# Altium PCB PCB Modulo mcp23017.PcbDoc
Units mm, origin at the board's own origin, x right, y up, seen from the top; angles counter-clockwise.
Board outline 25 x 61 mm, 4 copper layers (Top Layer, L1, L2, Bottom Layer), stack 0.603 mm thick; 67 components, 42 nets, 187 pads, 71 vias.
Unrouted connection lines stored in the file: 13.
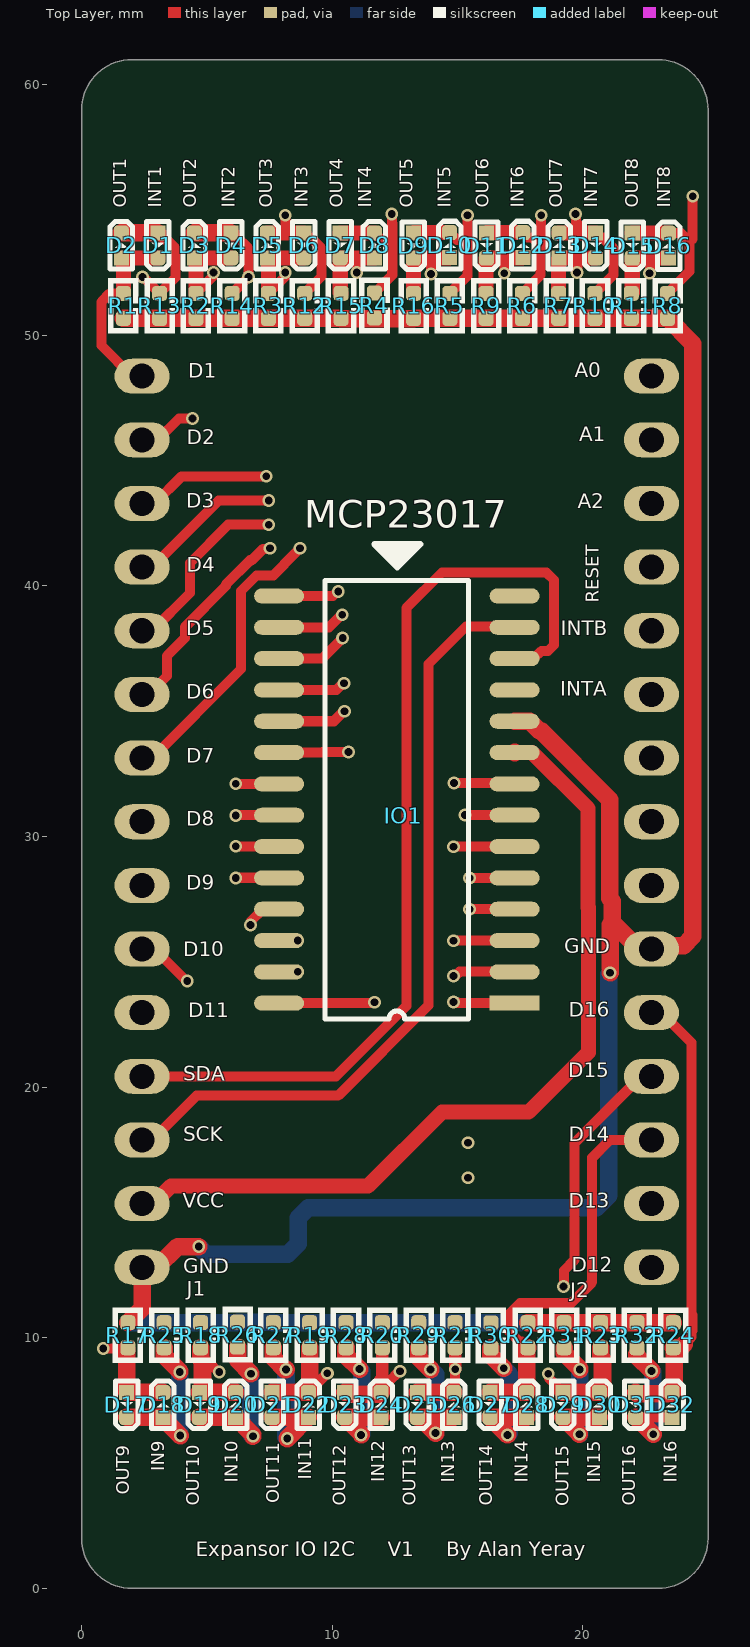
[diagram p0: Top Layer view]
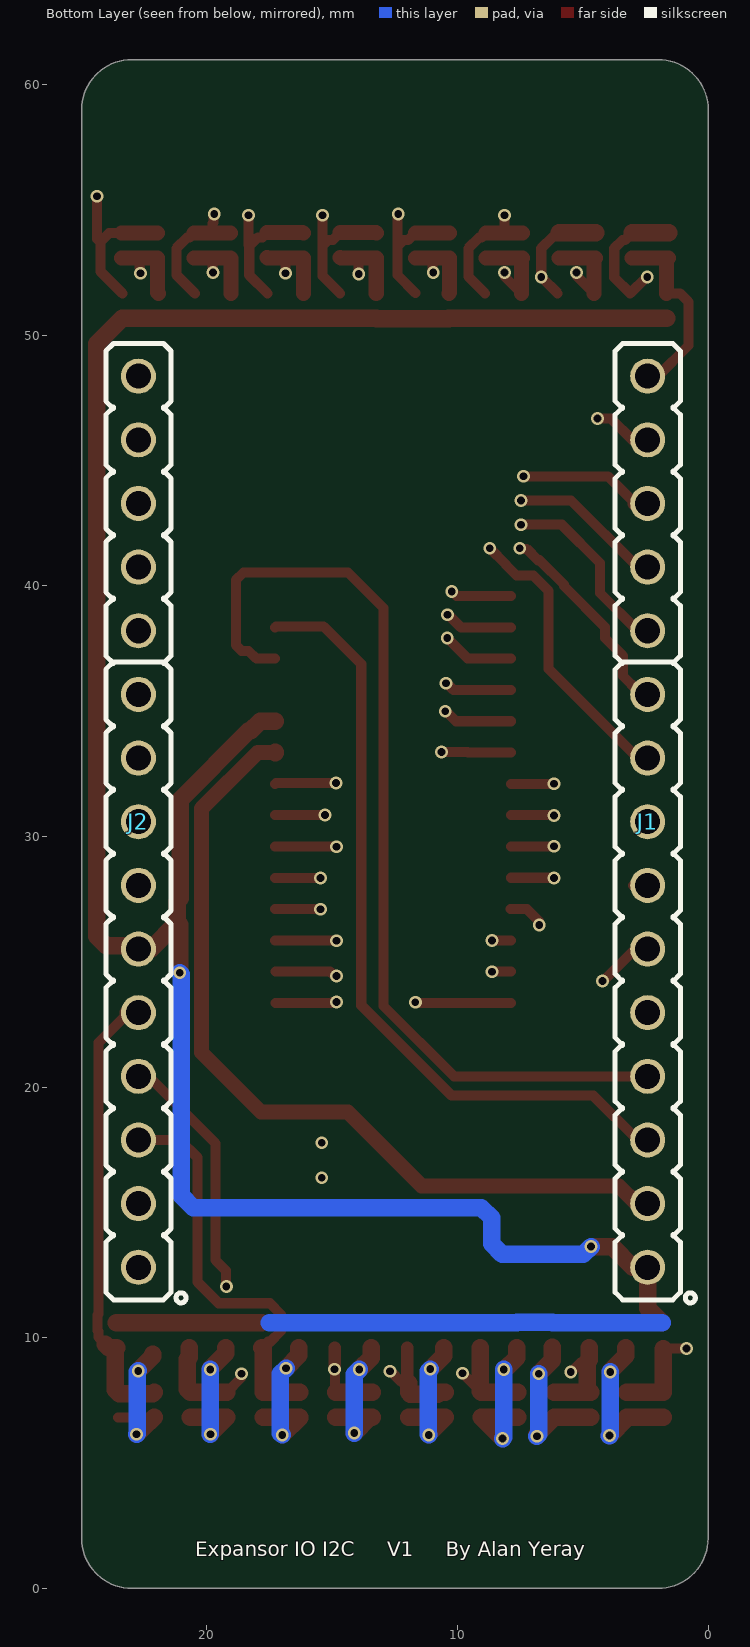
[diagram p1: Bottom Layer view, seen from below]
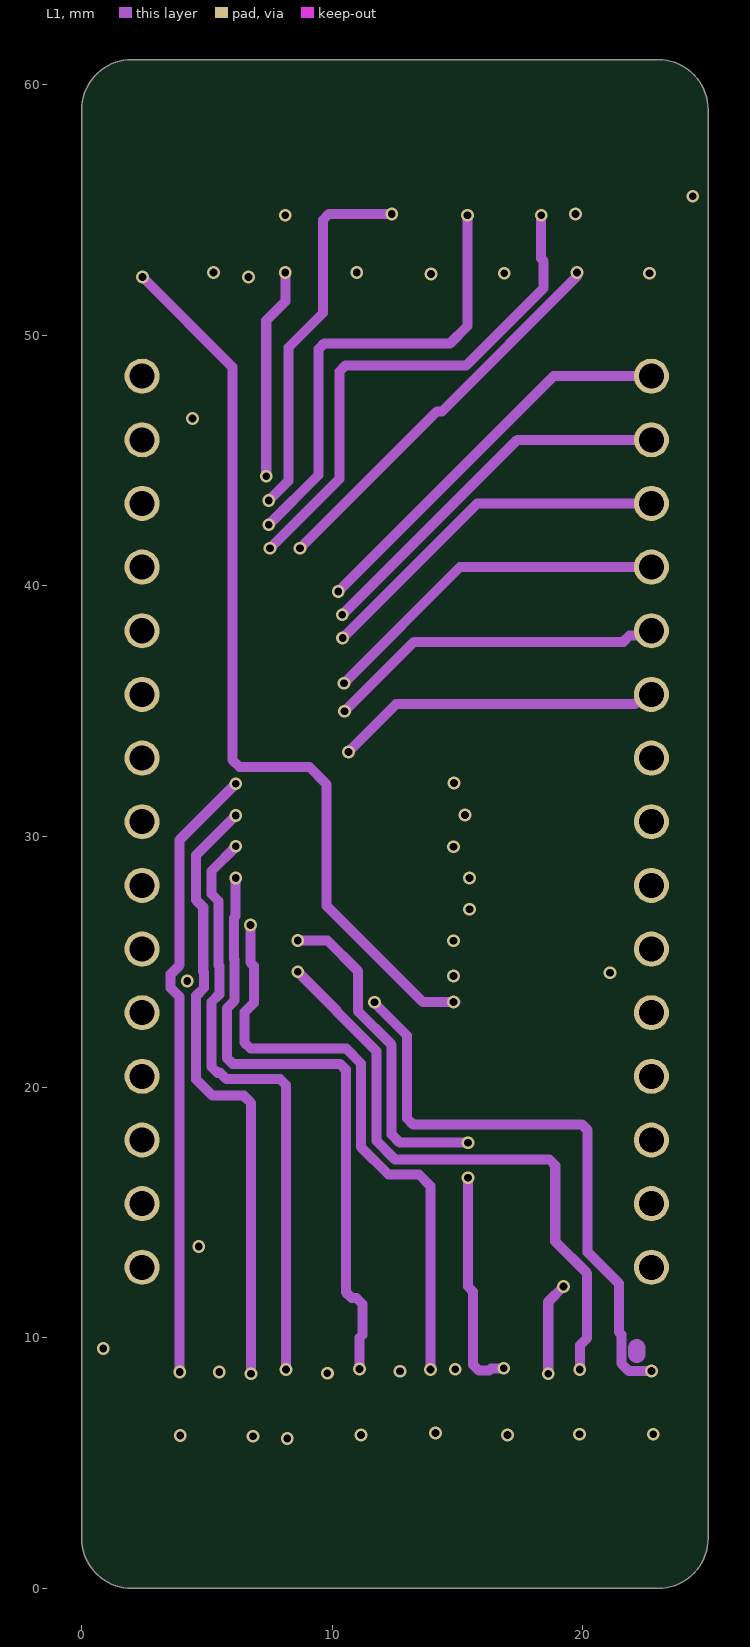
[diagram p2: L1]
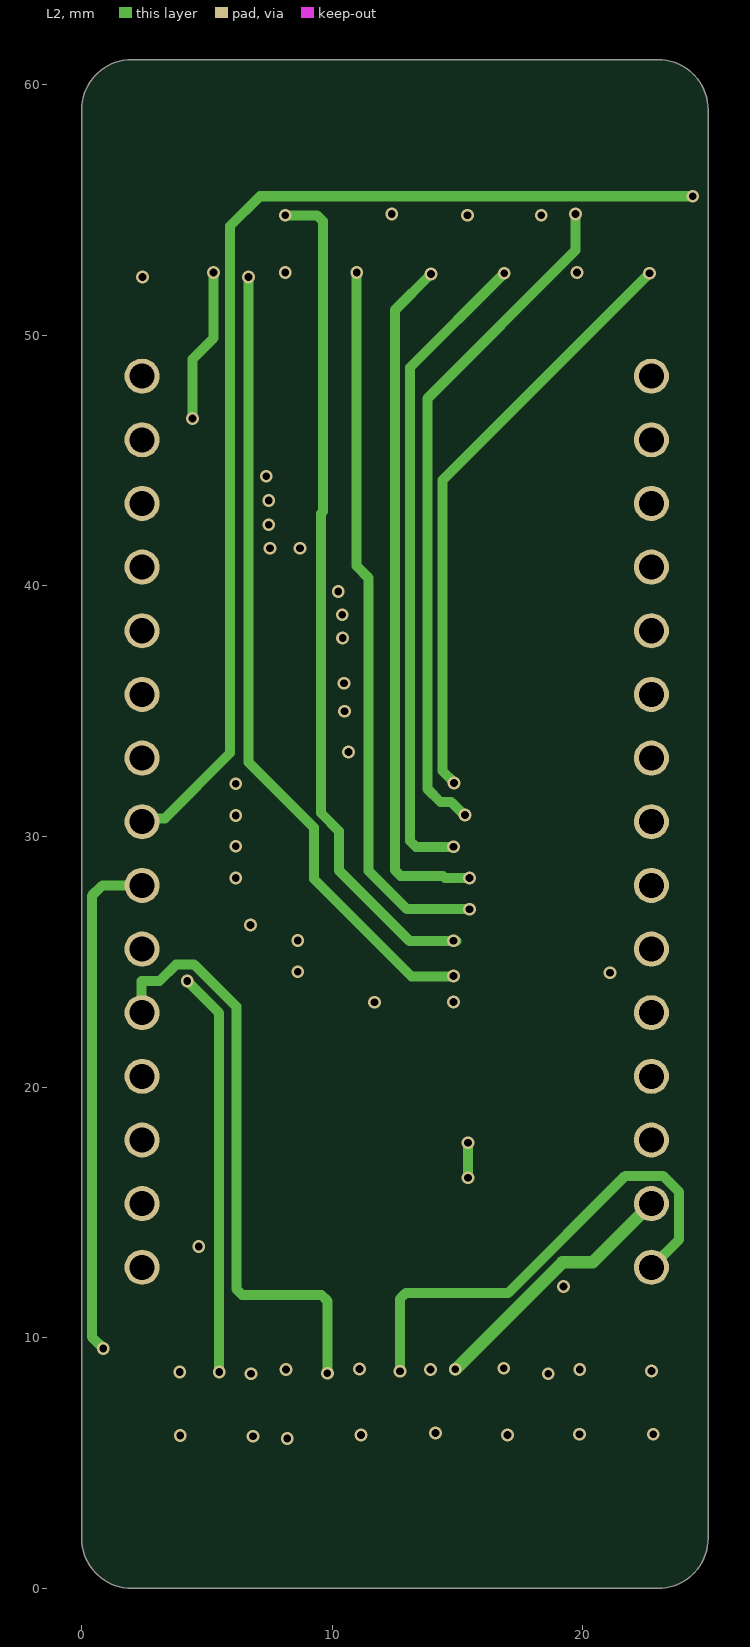
[diagram p3: L2]

## Layer stack, top to bottom
Top Solder: solder mask 0.0102, Solder Resist, Dk 3.5
Top Layer: signal copper 0.0356
Dielectric 2: prepreg 0.0711, PP-006, Dk 4.1
L1: signal copper 0.035
Dielectric 1: dielectric 0.32, FR-4, Dk 4.8
L2: signal copper 0.035
Dielectric 3: prepreg 0.0711, PP-006, Dk 4.1
Bottom Layer: signal copper 0.0356
Bottom Solder: solder mask 0.0102, Solder Resist, Dk 3.5

## Board outline
2,0 cw(c2,2) 0,2 0,58.992 cw(c2,59) 2,61 23,61 cw(c23,59) 25,59 25,2 cw(c23,2) 23,0

## Design rules (kind name [scope] priority, off if disabled: settings)
Clearance JLCPCB_1 [All] p1: gap=0.21 ignorepadtopadclearanceinfootprint=FALSE
PolygonConnect [All] p1: connectstyle=Relief reliefconductorwidth=0.254 reliefentries=4 polygonreliefangle="90 Angle" airgapwidth=0.254
RoutingVias JLCPCB [All] p1: holewidth=0.6 width=0.7 viastyle="Through Hole" minholewidth=0.31 minwidth=0.51 maxholewidth=1 maxwidth=2
SolderMaskExpansion [All] p1: expansion=0.102 istentingtop=FALSE
Width Width_GND [All] p1: maxlimit=2 minlimit=0.14 preferedwidth=0.7
Width JLCPCB_ [All] p2: maxlimit=0.5 minlimit=0.13 preferedwidth=0.2
30 further rules are at their usual default settings.

## Components (designator, comment, footprint, x,y, rotation, side; value= is the part's Value field where it differs from the comment)
D1 "LED402YLW" LED0402YLW 3.038,53.588 r270 top
D2 "LED402YLW" LED0402YLW 1.581,53.588 r90 top
D3 "LED402YLW" LED0402YLW 4.494,53.588 r90 top
D4 "LED402YLW" LED0402YLW 5.95,53.588 r270 top
D5 "LED402YLW" LED0402YLW 7.406,53.588 r90 top
D6 "LED402YLW" LED0402YLW 8.863,53.588 r270 top
D7 "LED402YLW" LED0402YLW 10.319,53.588 r270 top
D8 "LED402YLW" LED0402YLW 11.684,53.588 r90 top
D9 "LED402YLW" LED0402YLW 13.233,53.577 r270 top
D10 "LED402YLW" LED0402YLW 14.681,53.602 r90 top
D11 "LED402YLW" LED0402YLW 16.154,53.577 r270 top
D12 "LED402YLW" LED0402YLW 17.602,53.602 r90 top
D13 "LED402YLW" LED0402YLW 19.057,53.588 r90 top
D14 "LED402YLW" LED0402YLW 20.513,53.588 r270 top
D15 "LED402YLW" LED0402YLW 21.971,53.577 r270 top
D16 "LED402YLW" LED0402YLW 23.419,53.577 r90 top
D17 "LED402YLW" LED0402YLW 1.792,7.322 r270 top
D18 "LED402YLW" LED0402YLW 3.243,7.322 r90 top
D19 "LED402YLW" LED0402YLW 4.694,7.322 r270 top
D20 "LED402YLW" LED0402YLW 6.145,7.322 r90 top
D21 "LED402YLW" LED0402YLW 7.597,7.322 r270 top
D22 "LED402YLW" LED0402YLW 9.048,7.322 r90 top
D23 "LED402YLW" LED0402YLW 10.499,7.322 r270 top
D24 "LED402YLW" LED0402YLW 11.95,7.322 r90 top
D25 "LED402YLW" LED0402YLW 13.401,7.322 r270 top
D26 "LED402YLW" LED0402YLW 14.852,7.322 r90 top
D27 "LED402YLW" LED0402YLW 16.303,7.322 r270 top
D28 "LED402YLW" LED0402YLW 17.755,7.322 r90 top
D29 "LED402YLW" LED0402YLW 19.206,7.322 r270 top
D30 "LED402YLW" LED0402YLW 20.657,7.322 r90 top
D31 "LED402YLW" LED0402YLW 22.108,7.322 r270 top
D32 "LED402YLW" LED0402YLW 23.559,7.322 r90 top
IO1 "MCP23017" MCP23017-SOIC 12.578,31.475 r180 top
J1 "HDR1X15" HDR_M_1X15 2.413,30.591 r90 bottom value=HDRM15
J2 "HDR1X15" HDR_M_1X15 22.733,30.591 r90 bottom value=HDRM15
R1 "10K" R0402 1.662,51.175 r270 top
R2 "10K" R0402 4.558,51.175 r270 top
R3 "10K" R0402 7.454,51.175 r270 top
R4 "10K" R0402 11.684,51.192 r270 top
R5 "10K" R0402 14.693,51.175 r270 top
R6 "10K" R0402 17.588,51.175 r270 top
R7 "10K" R0402 19.036,51.175 r270 top
R8 "10K" R0402 23.379,51.175 r270 top
R9 "10K" R0402 16.14,51.175 r90 top
R10 "10K" R0402 20.484,51.175 r90 top
R11 "10K" R0402 21.932,51.175 r90 top
R12 "10K" R0402 8.901,51.175 r90 top
R13 "10K" R0402 3.11,51.175 r90 top
R14 "10K" R0402 6.006,51.175 r90 top
R15 "10K" R0402 10.349,51.175 r90 top
R16 "10K" R0402 13.245,51.175 r90 top
R17 "10K" R0402 1.842,10.1 r90 top
R18 "10K" R0402 4.744,10.1 r90 top
R19 "10K" R0402 9.098,10.1 r90 top
R20 "10K" R0402 12,10.1 r90 top
R21 "10K" R0402 14.902,10.1 r90 top
R22 "10K" R0402 17.805,10.1 r90 top
R23 "10K" R0402 20.707,10.1 r90 top
R24 "10K" R0402 23.609,10.1 r90 top
R25 "10K" R0402 3.293,10.1 r270 top
R26 "10K" R0402 6.223,10.127 r270 top
R27 "10K" R0402 7.647,10.1 r270 top
R28 "10K" R0402 10.549,10.1 r270 top
R29 "10K" R0402 13.451,10.1 r270 top
R30 "10K" R0402 16.332,10.092 r270 top
R31 "10K" R0402 19.256,10.1 r270 top
R32 "10K" R0402 22.158,10.1 r270 top

## Footprints (in the part's own frame and the unit in brackets; to place one, negate y for a bottom-side part, rotate by r counter-clockwise, add the part's x,y. Pads: shape width x height; smd on the part's side, far side on the other; paste and mask are expansions set on the pad)
HDR_M_1X15 [mm] "Connector; Header; 15 Position"
  round 1.4 / inner round 1.4 / far side oval 1.4x2.2 hole 1 mask+0.1: 1(-17.78,0) 2(-15.24,0) 3(-12.7,0) 4(-10.16,0) 5(-7.62,0) 6(-5.08,0) 7(-2.54,0) 8(0,0) 9(2.54,0) 10(5.08,0) 11(7.62,0) 12(10.16,0) 13(12.7,0) 14(15.24,0) 15(17.78,0)
  silkscreen extent -19.2,-1.9 19.08,1.3, body extent -19.05,-1.3 19.05,1.25, height 8.54
LED0402YLW [mm] "LED SMD 0402, YELLOW"
  rect 0.6x0.6 smd paste-2 mask+0.075: 1(-0.5,0)
  rrect50% 0.6x0.6 smd paste-2 mask+0.075: 2(0.5,0)
  silkscreen extent -0.95,-0.45 0.95,0.45, body extent -0.5,-0.25 0.51,0.25, height 0.45
MCP23017-SOIC [mm] "https://ww1.microchip.com/downloads/en/devicedoc/20001952c.pdf"
  rect 2x0.6 smd: 1(-4.7,8.125)
  oval 2x0.6 smd: 2(-4.7,6.875) 3(-4.7,5.625) 4(-4.7,4.375) 5(-4.7,3.125) 6(-4.7,1.875) 7(-4.7,0.625) 8(-4.7,-0.625) 9(-4.7,-1.875) 10(-4.7,-3.125) 11(-4.7,-4.375) "13 SDA"(-4.7,-6.875) 14(-4.7,-8.125) 15(4.7,-8.125) 16(4.7,-6.875) 17(4.7,-5.625) 18(4.7,-4.375) 19(4.7,-3.125) 20(4.7,-1.875) 21(4.7,-0.625) 22(4.7,0.625) 23(4.7,1.875) 24(4.7,3.125) 25(4.7,4.375) 26(4.7,5.625) 27(4.7,6.875) 28(4.7,8.125)
  round 1 on Top Overlay: 3(-5.207,9.398)
  oval 2x0.6 smd paste-2539.97: "12 SCK"(-4.7,-5.625)
  silkscreen extent -2.86,-8.75 2.87,8.75, body extent -5.28,-8.95 5.02,8.95, height 2.66
R0402 [mm] "CHIP Resistor, 1.0X0.5mm, 0402"
  rrect50% 0.6x0.6 smd mask+0.075: 1(-0.5,0) 2(0.5,0)
  silkscreen extent -1.1,-0.6 1.1,0.6, body extent -0.57,-0.27 0.58,0.28, height 0.41

## Part data
D1 D2 D3 D4 D5 D6 D7 D8 D9 D10 D11 D12 D13 D14 D15 D16 D17 D18 D19 D20 D21 D22 D23 D24 D25 D26 D27 D28 D29 D30 D31 D32: library part LED_SMD_0402_YLW, "LED, SMD, 0402, YELLOW", ASSEMBLY=ASSEMBLY, DESC=DESCRIPTION, MANF="Wurth Electronics", MANF_P#="150040VS73240, 150040YS73240, HSMY-C280, VAOL-S4GT4", PARAM2=2.2V, PRICE=0.3$
IO1: "16-Bit I/O Expander with Serial Interface", ComponentLink1Description=link, ComponentLink1URL=https://ww1.microchip.com/downloads/en/devicedoc/20001952c.pdf
J1 J2: library part "Header Male THT 1x15", "CONN, HEADER, Male, pitch: 2.54mm, 15POS"
R1 R2 R3 R4 R5 R6 R7 R8 R9 R10 R11 R12 R13 R14 R15 R16 R17 R18 R19 R20 R21 R22 R23 R24 R25 R26 R27 R28 R29 R30 R31 R32: library part RES_SMD, "RESISTOR, SMD", ASSEMBLY=ASSEMBLY, DESC=DESCRIPTION, DIST#=MOUSER, MANF=-, MANF_P#=-, PARAM=0.063W, PARAM2=1%, PRICE="100= 0.5$"

## Via types
v1: diameter 0.51, hole 0.31, Top Layer to Bottom Layer, 71 vias

## Nets (pads, with @x,y where several pads share a name; then routed paths per layer and width w, separated by ;. In a path a pad name is that pad's centre, name@x,y a point inside that pad or via, vN(x,y) a via of type N, cw(c..) or ccw(c..) an arc to the next point about the centre after c; other vN are vias at no path point)
A0: IO1.15 J2.15 | length 18.5
  Top Layer w0.4: IO1.15@7.873,39.605 10.034,39.605 10.206,39.777 v1(10.236,39.777)
  L1 w0.4: v1(10.236,39.777) 18.83,48.371 J2.15
A1: IO1.16 J2.14 | length 18
  Top Layer w0.4: IO1.16 9.871,38.35 10.371,38.85 v1(10.401,38.85)
  L1 w0.4: v1(10.401,38.85) 17.382,45.831 J2.14
A2: IO1.17 J2.13 | length 17.4
  Top Layer w0.4: IO1.17@7.873,37.105 9.597,37.105 v1(10.414,37.922)
  L1 w0.4: v1(10.414,37.922) 15.783,43.291 J2.13
Bit1: D1.1 D2.2 IO1.1 R13.2 | length 44.3
  Top Layer w0.4: v1(2.427,52.323) 2.448,52.302 2.483,52.302 R13.2 3.748,52.313 3.748,53.47 3.42,53.798 3.328,53.798 D1.1 ; v1@14.91,23.393 14.986,23.393 15.024,23.355 IO1.1@17.273,23.355
  Top Layer w0.7: D2.2 D1.1
  L1 w0.4: v1(2.427,52.323) 6.02,48.731 6.02,33.045 6.295,32.771 9.088,32.771 9.778,32.08 9.778,27.227 13.612,23.393 v1@14.91,23.393
  other v1: 14.834,23.393
Bit2: D3.2 D4.1 IO1.2 R14.2 | length 39.3
  Top Layer w0.4: D4.1 6.09,53.948 6.182,53.948 6.66,53.47 v1(6.66,52.329) R14.2 ; v1@14.884,24.435 14.914,24.435 15.084,24.605 IO1.2@17.273,24.605
  Top Layer w0.7: D3.2 D4.1
  L2 w0.4: v1(6.66,52.329) 6.66,32.964 9.271,30.353 9.271,28.301 13.163,24.409 14.859,24.409 v1@14.884,24.435
  other v1: 14.834,24.435
Bit3: D5.2 D6.1 IO1.3@17.278,25.85 R12.2 | length 41.2
  Top Layer w0.4: v1(8.128,54.788) 8.135,54.781 8.135,54.088 ; D6.1 9.053,53.898 9.145,53.898 9.573,53.47 9.573,52.346 R12.2 ; v1@14.959,25.84 14.964,25.845 17.273,25.845 IO1.3@17.278,25.85
  Top Layer w0.6: D5.2 8.135,54.088 D6.1
  L2 w0.4: v1(8.128,54.788) 9.392,54.788 9.627,54.553 9.627,42.961 9.55,42.885 9.55,30.936 10.262,30.225 10.262,28.651 13.073,25.84 v1@14.959,25.84
  other v1: 14.834,25.84
Bit4: D7.2 D8.1 IO1.4 R15.2 | length 33.9
  Top Layer w0.4: v1(10.973,52.502) 11.001,52.53 11.001,53.088 ; v1(15.473,27.101) IO1.4 IO1.4
  Top Layer w0.6: R15.2 10.319,51.705 D7.2 11.001,53.088 D8.1
  L2 w0.4: v1(10.973,52.502) 10.973,40.79 11.455,40.308 11.455,28.626 12.979,27.102 15.472,27.102 v1(15.473,27.101)
Bit5: D9.2 D10.1 IO1.5 R16.2 | length 32.8
  Top Layer w0.4: v1(13.945,52.451) 13.945,53.077 ; v1(15.473,28.35) IO1.5
  Top Layer w0.6: R16.2 13.245,53.065 D9.2 13.945,53.077 14.656,53.077 D10.1
  L2 w0.4: v1(13.945,52.451) 12.497,51.003 12.497,28.663 12.731,28.429 14.418,28.429 14.497,28.35 v1(15.473,28.35)
Bit6: D11.2 D12.1 IO1.6 R9.2 | length 31.9
  Top Layer w0.4: v1@14.808,29.591 14.813,29.595 17.274,29.595 IO1.6 ; v1(16.866,52.476) 16.866,53.077
  Top Layer w0.6: R9.2 16.14,53.063 D11.2 16.866,53.077 17.577,53.077 D12.1
  L2 w0.4: v1@14.808,29.591 13.341,29.591 13.107,29.825 13.107,48.718 v1(16.866,52.476)
  other v1: 14.834,29.591
Bit7: D13.2 D14.1 IO1.7 R10.2 | length 34.6
  Top Layer w0.4: v1(15.293,30.855) 17.273,30.855 IO1.7 ; v1(19.71,54.839) 19.731,54.818 19.731,54.505 19.785,54.452 19.785,54.088 ; R10.2 21.223,52.414 21.223,53.47 20.795,53.898 20.703,53.898 D14.1
  Top Layer w0.6: D13.2 19.785,54.088 D14.1
  L2 w0.4: v1(15.293,30.855) 15.263,30.855 14.744,31.374 14.32,31.374 13.792,31.903 13.792,47.473 19.71,53.391 v1(19.71,54.839)
Bit8: D15.2 D16.1 IO1.8 R11.2 | length 29.9
  Top Layer w0.4: v1(14.855,32.135) 17.243,32.135 IO1.8 ; v1(22.657,52.476) 22.678,52.497 22.678,52.691 22.695,52.709 22.695,53.077
  Top Layer w0.6: R11.2 21.971,51.714 D15.2 22.695,53.077 D16.1
  L2 w0.4: v1(14.855,32.135) 14.855,32.165 14.402,32.618 14.402,44.221 v1(22.657,52.476)
Bit9: D17.2 D18.1 IO1.21 R25.2 | length 32.7
  Top Layer w0.4: v1(6.147,32.106) v1@6.198,32.106 ; v1@6.198,32.105 IO1.21@7.873,32.105
  Top Layer w0.7: D17.2 D18.1 3.243,6.79 v1(3.937,6.096) ; R25.2 3.293,9.28 3.912,8.661 v1(3.912,8.636)
  L1 w0.4: v1(3.912,8.636) 3.912,23.596 3.551,23.956 3.551,24.507 3.912,24.867 3.912,29.87 v1(6.147,32.106)
  Bottom Layer w0.7: v1(3.912,8.636) 3.912,6.121 v1(3.937,6.096)
Bit10: D19.2 D20.1 IO1.22 R26.2 | length 32.9
  Top Layer w0.4: v1(6.147,30.836) 6.166,30.855 IO1.22@7.873,30.855
  Top Layer w0.7: D19.2 D20.1 6.833,6.135 v1(6.833,6.071) ; R26.2 6.223,9.093 v1(6.756,8.56)
  L1 w0.4: v1(6.147,30.836) 4.572,29.26 4.572,27.458 4.852,27.178 4.852,24.61 4.881,24.581 4.881,23.956 4.572,23.646 4.572,20.305 5.217,19.66 6.471,19.66 6.756,19.374 v1(6.756,8.56)
  Bottom Layer w0.7: v1(6.756,8.56) 6.756,6.147 v1(6.833,6.071)
Bit11: D21.2 D22.1 IO1.23 R27.2 | length 32.3
  Top Layer w0.4: v1@6.172,29.616 6.184,29.605 IO1.23@7.873,29.605
  Top Layer w0.7: D21.2 D22.1 v1(8.204,5.978) ; R27.2 7.647,9.194 8.108,8.732 v1(8.153,8.732)
  L1 w0.4: v1@6.172,29.616 5.182,28.626 5.182,27.711 5.462,27.431 5.462,24.863 5.491,24.833 5.491,23.703 5.182,23.394 5.182,20.808 5.416,20.574 5.519,20.574 5.773,20.32 7.919,20.32 8.153,20.085 v1(8.153,8.732)
  Bottom Layer w0.7: v1(8.153,8.732) 8.153,6.029 v1(8.204,5.978)
  other v1: 6.147,29.616
Bit12: D23.2 D24.1 IO1.24 R28.2 | length 32.5
  Top Layer w0.4: v1@6.198,28.346 6.206,28.355 IO1.24@7.873,28.355
  Top Layer w0.7: R28.2 10.549,9.289 v1(11.09,8.747) ; v1(11.151,6.121) 11.151,6.17 D23.2 D24.1
  L1 w0.4: v1@6.198,28.346 6.147,28.296 6.147,26.825 6.072,26.75 6.072,25.115 6.101,25.086 6.101,23.451 5.792,23.141 5.792,21.164 6.026,20.93 10.307,20.93 10.541,20.695 10.541,11.817 10.775,11.582 10.967,11.582 11.201,11.348 11.201,10.118 11.09,10.007 v1(11.09,8.747)
  Bottom Layer w0.7: v1(11.09,8.747) 11.176,8.661 11.176,6.147 v1(11.151,6.121)
  other v1: 6.147,28.346
Bit13: D25.2 D26.1 IO1.25 R29.2 | length 31.5
  Top Layer w0.4: v1@6.737,26.505 v1(6.737,26.475) 6.758,26.496 6.758,26.626 7.232,27.1 IO1.25
  Top Layer w0.7: D25.2 D25.2@13.498,6.822 ; R29.2 13.451,9.206 v1(13.925,8.732) ; v1(14.122,6.198) D25.2@13.498,6.822 ; D26.1 D25.2@13.498,6.822
  L1 w0.4: v1(6.737,26.475) 6.737,24.965 6.868,24.834 6.868,23.355 6.502,22.989 6.502,21.774 6.737,21.54 10.559,21.54 11.151,20.948 11.151,17.604 12.245,16.51 13.462,16.51 13.925,16.047 v1(13.925,8.732)
  Bottom Layer w0.7: v1(13.925,8.732) 14.122,8.534 v1(14.122,6.198)
Bit14: D27.2 D28.1 IO1.26 R30.2 | length 30.5
  Top Layer w0.4: IO1.26@7.873,25.855 v1(8.623,25.855)
  Top Layer w0.7: R30.2 16.332,9.296 v1(16.845,8.784) ; v1(16.993,6.121) 16.303,6.811 D27.2 D28.1
  L1 w0.4: v1(8.623,25.855) 9.807,25.855 11.019,24.643 11.019,23.04 12.371,21.688 12.371,18.109 12.695,17.785 15.41,17.785 v1(15.418,17.777) ; v1(15.418,16.383) 15.418,12.04 15.621,11.836 15.621,8.921 15.855,8.687 16.255,8.687 16.332,8.763 16.823,8.763 v1(16.845,8.784)
  L2 w0.4: v1(15.418,16.383) v1(15.418,17.777)
  Bottom Layer w0.7: v1(16.845,8.784) 17.069,8.56 17.069,6.198 v1(16.993,6.121)
Bit15: D29.2 D30.1 IO1.27 R31.2 | length 31.2
  Top Layer w0.4: IO1.27@7.873,24.605 v1(8.623,24.605)
  Top Layer w0.7: R31.2 19.256,9.381 19.873,8.764 v1(19.873,8.732) ; v1(19.863,6.147) 19.863,6.165 D29.2 D30.1
  L1 w0.4: v1(8.623,24.605) 10.16,23.068 10.16,23.036 11.761,21.435 11.761,17.856 12.498,17.12 15.135,17.12 15.142,17.112 18.663,17.112 18.898,16.878 18.898,13.844 20.172,12.569 20.172,9.987 19.888,9.703 19.888,8.747 v1(19.873,8.732)
  Bottom Layer w0.7: v1(19.863,6.147) 19.873,6.157 v1(19.873,8.732)
Bit16: D31.2 D32.1 IO1.28 R32.2 | length 33.8
  Top Layer w0.4: IO1.28@7.873,23.355 11.611,23.355 11.622,23.366 11.663,23.366 v1(11.684,23.387) ; D31.2 D32.1
  Top Layer w0.7: D31.2 22.285,6.645 22.311,6.645 v1(22.809,6.147) ; R32.2@22.158,9.338 22.158,9.262 v1(22.744,8.676)
  L1 w0.4: v1(11.684,23.387) 11.684,23.357 12.981,22.06 12.981,18.751 13.215,18.517 19.959,18.517 20.193,18.282 20.193,13.411 21.433,12.171 21.433,10.233 21.543,10.123 21.543,8.966 21.843,8.666 22.735,8.666 v1(22.744,8.676)
  L1 w0.7: 22.158,9.338 22.158,9.6
  Bottom Layer w0.7: v1(22.744,8.676) 22.784,8.636 22.784,6.172 v1(22.809,6.147)
c_Bit1: D1.2 D2.1 J1.15 R1.1 | length 7.8
  Top Layer w0.4: D2.1 D2.1@1.662,53.007 ; R1.1 1.125,51.675 0.787,51.338 0.787,49.597 2.013,48.371 J1.15
  Top Layer w0.6: D2.1 D1.2 ; R1.1 D2.1@1.662,53.007
c_Bit2: D3.1 D4.2 J1.14 R2.1 | length 12.5
  Top Layer w0.4: J1.14 3.029,45.831 3.884,46.685 v1(4.42,46.685) ; R2.1 5.237,52.354 5.237,52.481 v1(5.258,52.502)
  Top Layer w0.6: R2.1 4.558,53.024 D3.1 D4.2
  L2 w0.4: v1(4.42,46.685) 4.42,49.047 5.258,49.886 v1(5.258,52.502)
c_Bit3: D5.1 D6.2 J1.13 R3.1 | length 17.8
  Top Layer w0.4: J1.13@2.91,43.291 3.993,44.374 v1(7.366,44.374) ; R3.1 8.107,52.328 8.107,52.481 v1(8.128,52.502)
  Top Layer w0.6: J1.13 J1.13@2.91,43.291 ; R3.1 7.454,53.041 D5.1 D6.2
  L1 w0.4: v1(7.366,44.374) 7.366,50.587 8.128,51.349 v1(8.128,52.502)
c_Bit4: D7.1 D8.2 J1.12 R4.1 | length 26.8
  Top Layer w0.4: J1.12 2.813,40.751 5.471,43.409 v1(7.468,43.409) ; R4.1 12.394,52.402 12.394,53.558 ; D8.2 11.974,53.798 12.154,53.798 12.394,53.558 ; v1(12.37,54.839) 12.391,54.818 12.391,54.473 12.394,54.47 12.394,53.558
  Top Layer w0.6: D7.1 D8.2
  L1 w0.4: v1(7.468,43.409) 8.255,44.196 8.255,49.514 9.627,50.886 9.627,54.604 9.861,54.839 v1(12.37,54.839)
c_Bit5: D9.1 D10.2 J1.11 R5.1 | length 31.9
  Top Layer w0.4: J1.11 2.813,38.211 4.318,39.716 4.318,40.919 5.842,42.443 v1(7.468,42.443) ; D10.2 14.971,53.812 15.151,53.812 15.391,53.572 ; R5.1 15.391,52.374 15.391,53.572 ; v1(15.394,54.793) 15.394,53.574 15.391,53.572
  Top Layer w0.6: D9.1 13.259,54.102 D10.2
  L1 w0.4: v1(7.468,42.443) 9.449,44.425 9.449,49.448 9.683,49.682 14.707,49.682 15.394,50.37 v1(15.394,54.793)
c_Bit6: D11.1 D12.2 J1.10 R6.1 | length 34.8
  Top Layer w0.4: J1.10 2.813,35.671 2.813,35.815 3.404,36.405 3.404,37.211 4.115,37.922 4.115,38.354 5.753,39.992 5.753,40.052 6.726,41.025 6.786,41.025 7.243,41.483 7.497,41.483 v1(7.518,41.504) ; R6.1 18.312,52.399 18.312,53.572 ; D12.2 17.792,53.912 17.972,53.912 18.312,53.572 ; v1(18.339,54.788) 18.339,53.598 18.312,53.572
  Top Layer w0.6: D11.1 16.18,54.102 D12.2
  L1 w0.4: v1(7.518,41.504) 10.287,44.272 10.287,48.559 10.521,48.793 15.343,48.793 18.436,51.887 18.436,52.968 18.339,53.065 v1(18.339,54.788)
c_Bit7: D13.1 D14.2 J1.9 R7.1 | length 30.8
  Top Layer w0.4: J1.9 2.813,33.131 6.363,36.681 6.363,39.799 6.979,40.415 7.649,40.415 8.068,40.834 8.068,40.859 v1(8.712,41.504) ; v1(19.761,52.502) 19.782,52.523 19.782,53.086 19.785,53.088
  Top Layer w0.6: R7.1 19.036,53.067 D13.1 19.785,53.088 D14.2
  L1 w0.4: v1(8.712,41.504) 14.173,46.965 14.376,46.965 19.74,52.328 19.74,52.481 v1(19.761,52.502)
c_Bit8: D15.1 D16.2 J1.8 R8.1 | length 51.8
  Top Layer w0.4: J1.8 J1.8@2.813,30.591 ; R8.1 24.257,52.553 24.257,53.725 ; D16.2 23.906,54.077 24.257,53.725 ; v1(24.384,55.55) 24.384,53.852 24.257,53.725
  Top Layer w0.6: D15.1 D16.2
  L2 w0.4: J1.8 2.547,30.725 3.318,30.725 5.923,33.329 5.923,54.361 7.112,55.55 v1(24.384,55.55)
c_Bit9: D17.1 D18.2 J1.7 R17.1 | length 25.1
  Top Layer w0.4: v1(0.864,9.576) 1.766,9.576 R17.1@1.792,9.55 ; J1.7 J1.7@3.009,28.051
  Top Layer w0.7: R17.1@1.792,9.55 D17.1 D18.2
  L2 w0.4: v1(0.864,9.576) 0.406,10.033 0.406,27.635 0.822,28.051 J1.7
c_Bit10: D19.1 D20.2 J1.6 R18.1 | length 22.6
  Top Layer w0.4: J1.6 2.907,25.511 4.187,24.232 v1(4.216,24.232) ; 4.822,9.038 5.059,9.038 5.461,8.636 v1(5.486,8.636)
  Top Layer w0.7: R18.1 4.744,9.116 4.822,9.038 4.822,7.949 D19.1 D20.2
  L2 w0.4: v1(4.216,24.232) 5.486,22.962 v1(5.486,8.636)
c_Bit11: D21.1 D22.2 J1.5 R19.1 | length 28.3
  Top Layer w0.4: J1.5@2.4,22.984 J1.5 ; D22.2 9.098,7.872 9.804,8.579 v1(9.804,8.585)
  Top Layer w0.7: D21.1 D22.2 ; D22.2@9.098,7.872 R19.1
  L2 w0.4: J1.5 2.388,22.996 2.388,24.232 3.107,24.232 3.772,24.897 4.492,24.897 6.172,23.216 6.172,11.944 6.407,11.709 9.57,11.709 9.804,11.475 v1(9.804,8.585)
c_Bit12: D23.1 D24.2 J2.1 R20.1 | length 24.2
  Top Layer w0.4: 12,8.238 12.247,8.238 12.67,8.661 v1(12.7,8.661)
  Top Layer w0.5: 12,8.238 R20.1
  Top Layer w0.7: D23.1 10.728,7.822 10.799,7.751 11.879,7.751 D24.2 11.95,8.188 12,8.238
  L2 w0.4: v1(12.7,8.661) 12.7,11.551 12.934,11.786 17.018,11.786 21.693,16.461 23.193,16.461 23.843,15.811 23.843,13.921 J2.1 J2.1@22.585,12.959
c_Bit13: D25.1 D26.2 J2.2 R21.1 | length 13.8
  Top Layer w0.4: D26.2 14.89,7.86 14.89,8.717 v1(14.911,8.738)
  Top Layer w0.5: v1@14.902,8.738 R21.1
  Top Layer w0.7: D25.1 D26.2
  L2 w0.5: v1(14.911,8.738) 19.182,13.009 20.391,13.009 J2.2
c_Bit14: D27.1 D28.2 J2.3 R22.1 | length 16.4
  Top Layer w0.4: R22.1 17.565,9.84 17.473,9.84 17.045,10.268 17.045,10.932 17.489,11.377 19.531,11.377 20.37,12.216 20.37,17.185 21.076,17.891 J2.3
  Top Layer w0.7: D27.1 D28.2 17.755,9.55 R22.1
c_Bit15: D29.1 D30.2 J2.4 R23.1 | length 18.1
  Top Layer w0.4: v1(18.618,8.56) 18.639,8.539 18.639,8.388 D29.1 ; v1(19.226,12.042) 19.247,12.063 19.247,12.684 19.66,13.097 19.66,17.758 22.333,20.431 J2.4
  Top Layer w0.7: D29.1 D30.2 20.783,7.948 20.783,9.141 20.707,9.217 R23.1
  L1 w0.4: v1(18.618,8.56) 18.618,11.434 v1(19.226,12.042)
c_Bit16: D31.1 D32.2 J2.5 R24.1 | length 18.1
  Top Layer w0.4: J2.5@23.133,22.971 24.333,21.771 24.333,10.951 24.369,10.915 24.369,10.285 24.333,10.249 24.333,10.02 24.053,9.74
  Top Layer w0.7: D31.1 22.164,7.766 23.503,7.766 23.654,7.917 23.654,9.555 R24.1 23.913,9.6 24.053,9.74 ; J2.5 J2.5@23.133,22.971
NetIO1_18: IO1.18 J2.12 | length 16.9
  Top Layer w0.4: IO1.18@7.873,35.855 10.171,35.855 10.435,36.119 v1(10.465,36.119)
  L1 w0.4: v1(10.465,36.119) 15.097,40.751 J2.12
NetIO1_19: IO1.19 J2.11 | length 16.4
  Top Layer w0.4: IO1.19@7.873,34.605 IO1.19 10.059,34.6 10.46,35.001 v1(10.49,35.001)
  L1 w0.4: v1(10.49,35.001) 11.784,36.295 13.259,37.77 21.615,37.77 21.865,38.02 22.542,38.02 J2.11
NetIO1_20: IO1.20 J2.10 | length 15.8
  Top Layer w0.4: IO1.20@7.873,33.355 7.875,33.353 9.588,33.353 9.611,33.376 v1(10.643,33.376)
  L1 w0.4: v1@10.66,33.393 12.548,35.281 22.072,35.281 22.462,35.671 J2.10
SCK: "IO1.12 SCK" J1.4 | length 38.6
  Top Layer w0.4: J1.4 10.144,20.431 12.954,23.241 12.954,39.119 14.374,40.538 18.542,40.538 18.847,40.234 18.847,37.643 18.612,37.408 18.341,37.408 18.032,37.1 17.278,37.1
SDA: "IO1.13 SDA" J1.3 | length 31.3
  Top Layer w0.4: J1.3 2.813,17.891 4.582,19.66 10.236,19.66 13.843,23.266 13.843,36.881 15.342,38.379 17.249,38.379 17.278,38.35
VCC: IO1.9 J1.2 | length 33.9
  Top Layer w0.6: J1.2 2.863,15.351 3.564,16.053 11.431,16.053 14.377,18.999 17.835,18.999 20.225,21.389 20.225,27.161 20.213,27.173 20.213,31.115 17.973,33.355 IO1.9@17.273,33.355
  Top Layer w0.7: IO1.9@17.273,33.355 IO1.9
xGND: IO1.10 J1.1 J2.6 R1.2 R2.2 R3.2 R4.2 R5.2 R6.2 R7.2 R8.2 R9.1 R10.1 R11.1 R12.1 R13.1 R14.1 R15.1 R16.1 R17.2 R18.2 R19.2 R20.2 R21.2 R22.2 R23.2 R24.2 R25.1 R26.1 R27.1 R28.1 R29.1 R30.1 R31.1 R32.1 | length 120.6
  Top Layer w0.7: R1.2 R13.1 R2.2 R14.1 R3.2 R12.1 R15.1 10.361,50.664 11.887,50.664 13.233,50.664 R16.1 R5.2 R9.1 R6.2 R7.2 R10.1 R11.1 R8.2 24.393,49.661 24.393,26.019 24.019,25.645 22.867,25.645 J2.6 22.241,25.511 21.18,26.572 ; R17.2 2.413,11.171 J1.1 3.002,12.811 3.831,13.64 v1(4.674,13.64) ; IO1.10@17.273,34.605 17.873,34.605 18.263,34.215 18.329,34.215 21.073,31.471 21.073,27.529 21.18,27.422 21.18,26.572 ; R22.2 R31.1 R23.2 R32.1 R24.2 ; v1(21.085,24.565) 21.085,26.477 21.18,26.572
  Bottom Layer w0.7: 1.842,10.6 6.196,10.6 6.223,10.627 7.62,10.627 7.647,10.6 10.549,10.6 ; v1(4.674,13.64) 4.978,13.335 8.226,13.335 8.636,13.745 8.636,14.779 9.046,15.189 20.545,15.189 21.031,15.675 21.031,24.511 v1(21.085,24.565) ; 12,10.6 10.549,10.6 ; 13.451,10.6 10.549,10.6 ; 17.505,10.6 16.34,10.6 16.332,10.592 16.324,10.6 10.549,10.6
pads on no net: IO1.3@17.785,22.077 IO1.11 IO1.14 J2.7 J2.8 J2.9

## Silkscreen, mask and mechanical layers (free items; w line width, h text height)
Top Overlay:
  rectangle: 12.446,40.919 12.751,41.529
  rectangle: 12.294,41.021 12.929,41.351
  rectangle: 12.09,41.204 13.056,41.504
  rectangle: 11.913,41.377 13.284,41.656
  lines w0.254: 11.684,41.661 13.513,41.661 12.598,40.747 11.684,41.661
  text "OUT1" at 1.952,55.098 h0.9 r90
  text "INT1" at 3.359,55.098 h0.9 r90
  text "OUT2" at 4.746,55.098 h0.9 r90
  text "INT2" at 6.28,55.098 h0.9 r90
  text "OUT3" at 7.794,55.098 h0.9 r90
  text "INT3" at 9.191,55.098 h0.9 r90
  text "OUT4" at 10.588,55.098 h0.9 r90
  text "INT4" at 11.741,55.098 h0.9 r90
  text "OUT5" at 13.382,55.098 h0.9 r90
  text "INT5" at 14.906,55.098 h0.9 r90
  text "OUT6" at 16.43,55.098 h0.9 r90
  text "INT6" at 17.827,55.098 h0.9 r90
  text "OUT7" at 19.351,55.098 h0.9 r90
  text "INT7" at 20.758,55.098 h0.9 r90
  text "OUT8" at 22.399,55.098 h0.9 r90
  text "INT8" at 23.669,55.098 h0.9 r90
  text "D1" at 4.245,48.117 h1
  text "A0" at 19.667,48.128 h1
  text "A1" at 19.855,45.577 h1
  text "D2" at 4.186,45.45 h1
  text "D3" at 4.183,42.921 h1
  text "A2" at 19.796,42.91 h1
  text "MCP23017" at 8.874,42.316 h1.1
  text "D4" at 4.184,40.37 h1
  text "RESET" at 20.818,39.321 h0.9 r90
  text "D5" at 4.18,37.841 h1
  text "INTB" at 19.113,37.83 h1
  text "INTA" at 19.089,35.417 h1
  text "D6" at 4.183,35.301 h1
  text "D7" at 4.183,32.75 h1
  text "D8" at 4.182,30.221 h1
  text "D9" at 4.182,27.681 h1
  text "GND" at 19.247,25.141 h1
  text "D10" at 4.062,25.014 h1
  text "D11" at 4.25,22.59 h1
  text "D16" at 19.428,22.601 h1
  text "D15" at 19.426,20.188 h1
  text "SDA" at 4.054,20.061 h1
  text "SCK" at 4.055,17.648 h1
  text "D14" at 19.429,17.637 h1
  text "VCC" at 4.029,14.981 h1
  text "D13" at 19.428,14.981 h1
  text "D12" at 19.558,12.43 h1
  text "GND" at 4.058,12.381 h1
  text "J1" at 4.193,11.466 h1
  text "J2" at 19.501,11.425 h1
  text "IN9" at 3.483,4.666 h0.9 r90
  text "IN11" at 9.335,4.331 h0.9 r90
  text "IN10" at 6.404,4.221 h0.9 r90
  text "IN12" at 12.256,4.225 h0.9 r90
  text "IN13" at 15.04,4.219 h0.9 r90
  text "IN14" at 17.971,4.221 h0.9 r90
  text "IN15" at 20.882,4.215 h0.9 r90
  text "IN16" at 23.93,4.219 h0.9 r90
  text "OUT9" at 2.086,3.736 h0.9 r90
  text "OUT11" at 8.055,3.4 h0.9 r90
  text "OUT10" at 4.88,3.29 h0.9 r90
  text "OUT12" at 10.722,3.294 h0.9 r90
  text "OUT13" at 13.516,3.288 h0.9 r90
  text "OUT14" at 16.564,3.291 h0.9 r90
  text "OUT15" at 19.612,3.284 h0.9 r90
  text "OUT16" at 22.279,3.288 h0.9 r90
  text "Expansor IO I2C     V1     By Alan Yeray" at 4.559,1.078 h1
Bottom Overlay:
  text "Expansor IO I2C     V1     By Alan Yeray" at 20.46,1.078 h1
Mechanical 1:
  the board outline again, w0.254